# Altium PCB PCB2.PcbDoc
Units mm, origin at the board's own origin, x right, y up, seen from the top; angles counter-clockwise.
Board outline 28 x 43 mm, 2 copper layers (Top Layer, Bottom Layer); 31 components, 24 nets, 110 pads, 0 vias.
Unrouted connection lines stored in the file: 2.
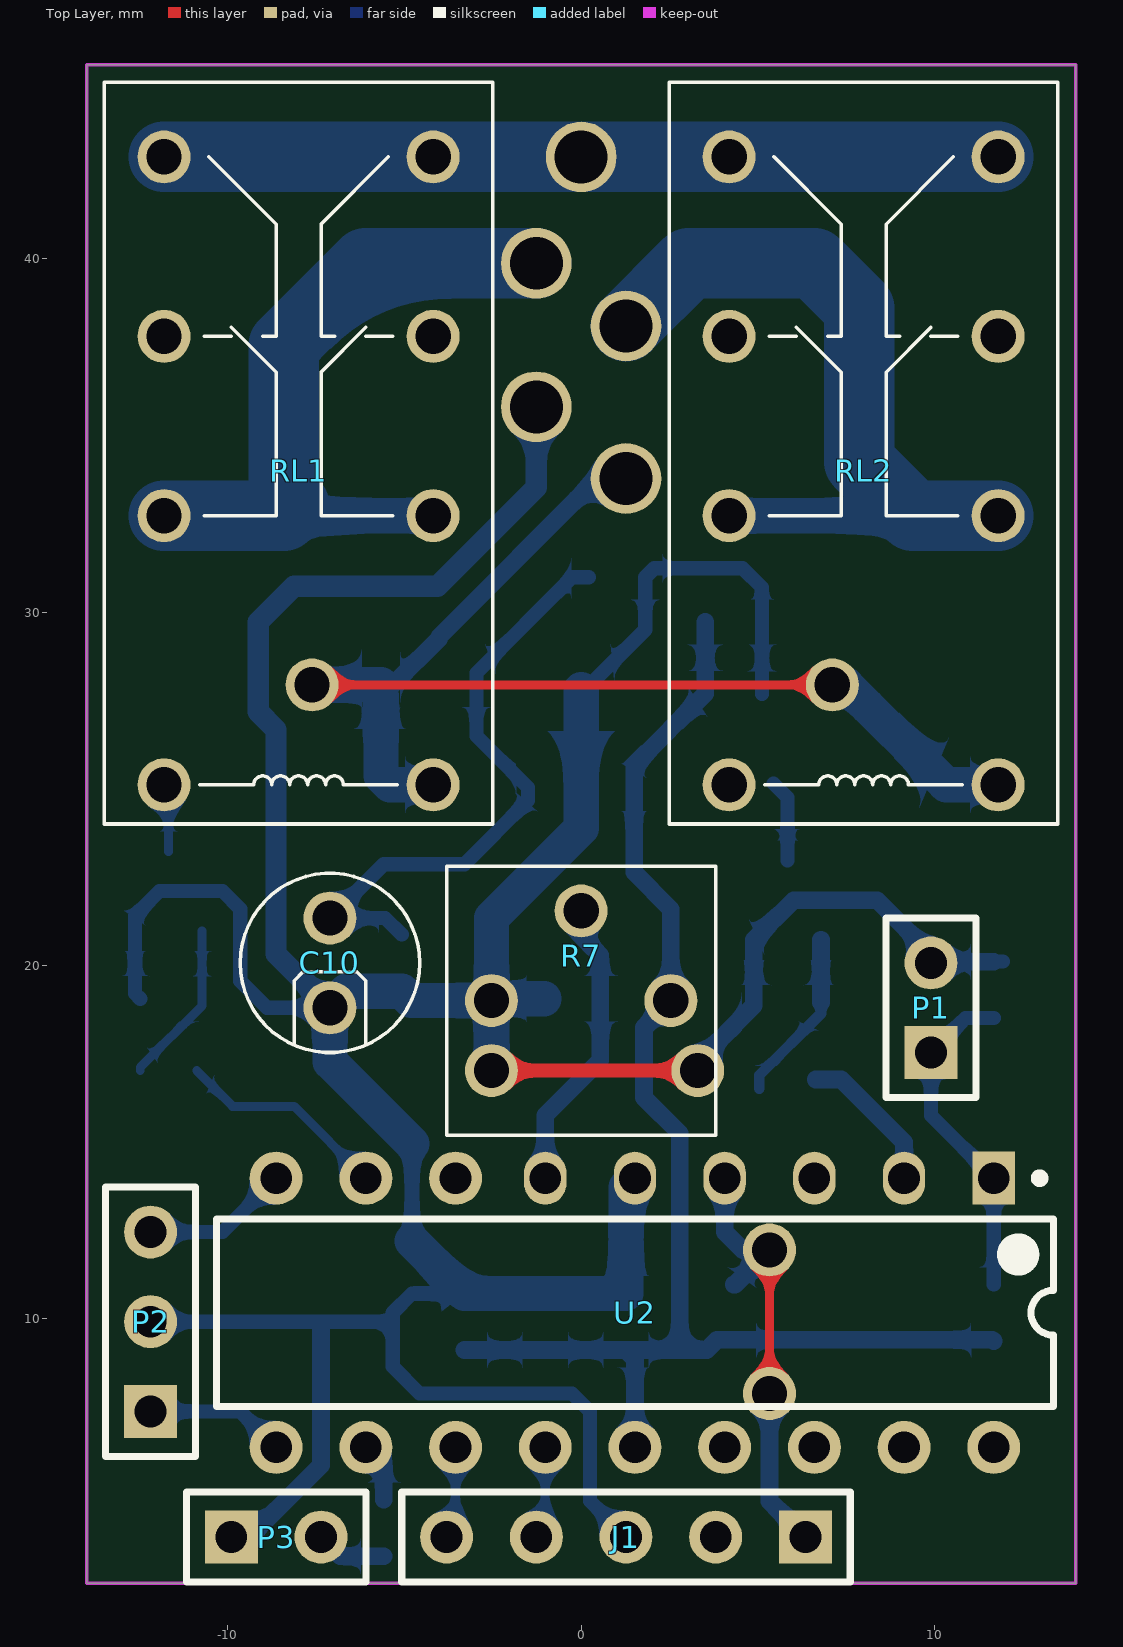
[diagram p0: Top Layer view]
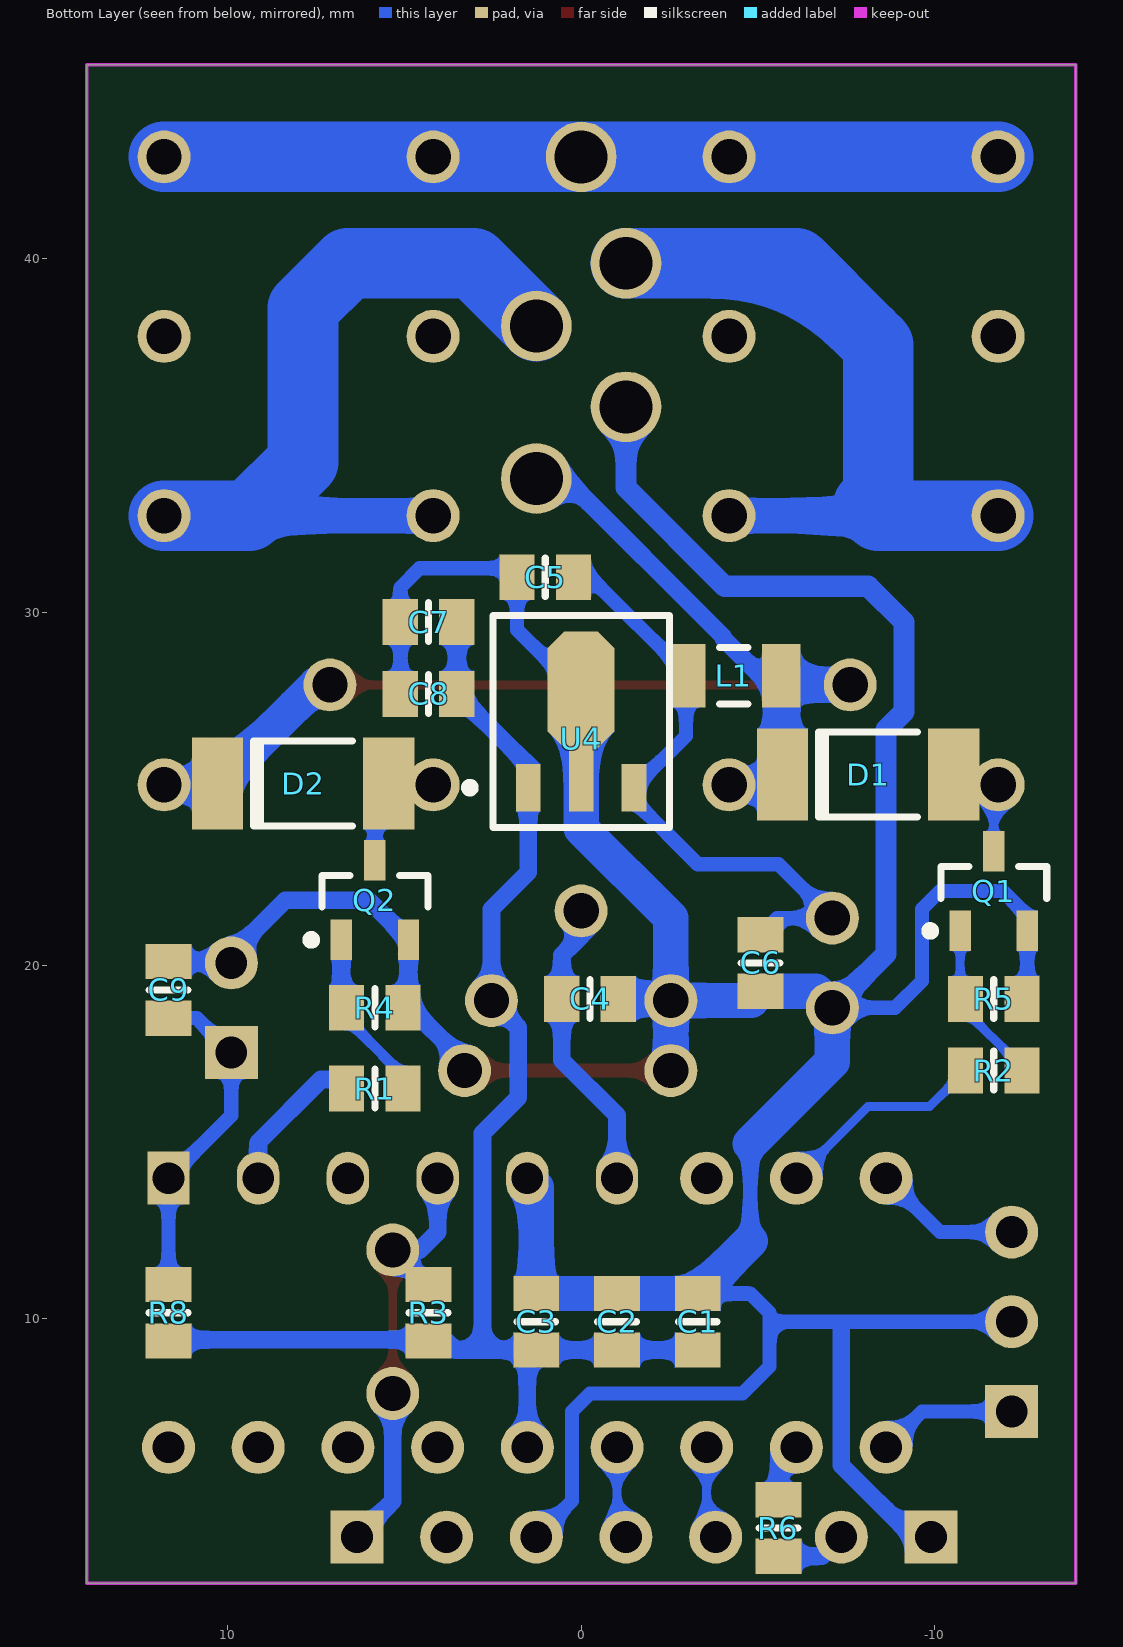
[diagram p1: Bottom Layer view, seen from below]

## Layer stack, top to bottom
Top Solder: solder mask 0.0102, Solder Resist, Dk 3.5
Top Layer: signal copper 0.0356
Dielectric1: dielectric 0.32, FR-4, Dk 4.8
Bottom Layer: signal copper 0.0356
Bottom Solder: solder mask 0.0102, Solder Resist, Dk 3.5

## Board outline
-14,2.5 -14,45.5 14,45.5 14,2.5

## Design rules (kind name [scope] priority, off if disabled: settings)
Clearance [All] p1: gap=0.254
HoleToHoleClearance [All] p1 off: gap=0.254 allowstackedmicrovias=TRUE
MinimumSolderMaskSliver [All] p1 off: minsoldermaskwidth=0.254
PolygonConnect [All] p1: connectstyle=Direct reliefconductorwidth=0.254 reliefentries=4 polygonreliefangle="90 Angle" airgapwidth=0.254
RoutingVias [All] p1: holewidth=0.711 width=1.27 viastyle="Through Hole" minholewidth=0.711 minwidth=1.27 maxholewidth=3 maxwidth=2
SilkToSolderMaskClearance SilkscreenOverComponentPads [IsPad] p1 off: minsilkscreentomaskgap=0.254 clearancetoexposedcopper=TRUE
SolderMaskExpansion [All] p1: expansion=0.102
Width [All] p1: maxlimit=2 minlimit=0.254 preferedwidth=0.3
27 further rules are at their usual default settings.

## Components (designator, comment, footprint, x,y, rotation, side; value= is the part's Value field where it differs from the comment)
C1 "Cap Semi" RESC2012L -3.302,9.906 r270 bottom
C2 "Cap Semi" RESC2012L -1.016,9.906 r270 bottom
C3 "Cap Semi" RESC2012L 1.27,9.906 r270 bottom
C4 "Cap Semi" RESC2012L -0.254,19.05 r0 bottom
C5 "Cap Semi" RESC2012L 1.016,30.988 r180 bottom
C6 "Cap Semi" RESC2012L -5.08,20.066 r90 bottom
C7 "Cap Semi" RESC2012L 4.318,29.718 r180 bottom
C8 "Cap Semi" RESC2012L 4.318,27.686 r180 bottom
C9 "Cap Semi" RESC2012L 11.684,19.304 r270 bottom
C10 "Cap Pol1" CAP5 -7.112,20.066 r90 top
D1 "1n4148" MELF-D5022-2009 -8.128,25.4 r0 bottom
D2 "1n4148" MELF-D5022-2009 7.874,25.146 r0 bottom
J1 "programer" HDR1x5 6.35,3.81 r180 top
L1 "" INDC3216 -4.318,28.194 r0 bottom
P1 "Header 2" HDR1X2 9.906,17.526 r90 top
P2 "Header 3" HDR1X3 -12.192,7.366 r90 top
P3 "LED" HDR1X2 -9.906,3.81 r0 top
Q1 "C1815" SOT-23B -11.684,22.098 r270 bottom
Q2 "NPN" SOT-23B 5.842,21.844 r270 bottom
R1 "Res3" RESC2012L 5.842,16.51 r180 bottom
R2 "Res3" RESC2012L -11.684,17.018 r180 bottom
R3 "Res3" RESC2012L 4.318,10.16 r90 bottom
R4 "Res3" RESC2012L 5.842,18.796 r180 bottom
R5 "Res3" RESC2012L -11.684,19.05 r180 bottom
R6 "Res3" RESC2012L -5.588,4.064 r270 bottom
R7 "Res Tap" VR_V_MH 0,19 r0 top locked
R8 "Res3" RESC2012L 11.684,10.16 r90 bottom
RL1 "Relay-DPDT" RELAY_8PIN_MH -8,34 r0 top locked
RL2 "Relay-DPDT" RELAY_8PIN_MH 8,34 r0 top locked
U2 "PIC18F1220-E/P" PDIP300-P18 1.524,10.16 r270 top locked
U4 "µA78L05ACPKR" PK03 0,26.416 r0 bottom

## Footprints (in the part's own frame and the unit in brackets; to place one, negate y for a bottom-side part, rotate by r counter-clockwise, add the part's x,y. Pads: shape width x height; smd on the part's side, far side on the other; paste and mask are expansions set on the pad)
CAP5 [mm]
  round 1.5 hole 1 mask+0.01: 1(1.27,0) 2(-1.27,0)
  silkscreen extent -2.54,-2.54 2.54,2.54
HDR1X2 [mm] "Connector; Header; 2 Position"
  rect 1.5x1.5 hole 0.9: 1(0,0)
  round 1.5 hole 0.9: 2(2.54,0)
  silkscreen extent -1.27,-1.27 3.81,1.27
HDR1X3 [mm] "Connector; Header; 3 Position"
  rect 1.5x1.5 hole 0.9: 1(0,0)
  round 1.5 hole 0.9: 2(2.54,0) 3(5.08,0)
  silkscreen extent -1.27,-1.27 6.35,1.27
HDR1x5 [mm] "Connector; Header; 5 Position"
  rect 1.5x1.5 hole 0.9: 1(0,0)
  round 1.5 hole 0.9: 2(2.54,0) 3(5.08,0) 4(7.62,0) 5(10.16,0)
  silkscreen extent -1.27,-1.27 11.43,1.27
INDC3216 [mm] "Chip Inductor, Body 3.2x1.6mm, IPC High Density"
  rect 1.1x1.8 smd: 1(-1.35,0) 2(1.35,0)
  silkscreen extent -0.4,-0.8 0.4,0.8, body extent -1.7,-0.9 1.7,0.9, height 0.55
MELF-D5022-2009 [mm] "Metal Electrode Face (MELF) Diode; Body 5 x 2.5 mm (LxDia)"
  rect 1.45x2.6 smd: 1(-2.425,0) 2(2.425,0)
  silkscreen extent -1.4,-1.2 1.4,1.2
PDIP300-P18 [mm] "DIP, 18-Leads, Row Spacing 7.62mm, Pitch 2.54mm, Body 22.9x6.6mm"
  rect 1.5x1.2 hole 0.9: 1(-3.81,10.16)
  oval 1.5x1.2 hole 0.9: 2(-3.81,7.62) 3(-3.81,5.08) 4(-3.81,2.54) 5(-3.81,0) 6(-3.81,-2.54)
  round 1.5 hole 0.9: 7(-3.81,-5.08) 8(-3.81,-7.62) 9(-3.81,-10.16) 10(3.81,-10.16) 11(3.81,-7.62) 12(3.81,-5.08) 13(3.81,-2.54) 14(3.81,0) 15(3.81,2.54) 16(3.81,5.08) 17(3.81,7.62) 18(3.81,10.16)
  silkscreen extent -3.93,-11.85 2.65,11.85, body extent -3.6,-11.8 3.6,11.8, height 5.34
PK03 [mm] "SOT-89; Body 4.6 x 4.25 mm, inc. leads (LxW max)"
  rect 0.7x1.35 smd: 1(1.5,1.388) 3(-1.5,1.388)
  rect 0.7x1.8 smd: 2(0,1.162)
  oct 1.9x3.3 smd: 4(0,-1.388)
  silkscreen extent -2.5,-3.49 3.28,2.51
RELAY_8PIN_MH [mm]
  round 1.5 hole 1 mask+0.01: 1(-3.81,-1.27) 2(-3.81,3.81) 3(-3.81,8.89) 4(3.81,-1.27) 5(3.81,3.81) 6(3.81,8.89) 7(-3.81,-8.89) 8(3.81,-8.89)
  silkscreen extent -5.5,-10 5.5,11
RESC2012L [mm] "Chip Resistor, Body 2.0x1.3mm, IPC High Density"
  rect 1x1.3 smd: 1(-0.8,0) 2(0.8,0)
  silkscreen extent 0,-0.55 0,0.55, body extent -1.07,-0.7 1.07,0.7, height 0.65
SOT-23B [mm] "SOT23, 3-Leads, Body 2.9x1.3mm, Pitch 0.95mm, Lead Span 2.4mm, IPC Medium Density"
  rect 1.15x0.6 smd: 1(-1.125,0) 2(1.125,-0.95) 3(1.125,0.95)
  silkscreen extent -0.7,-1.93 1.25,1.5, body extent -0.7,-1.5 0.7,1.5, height 1.14
VR_V_MH [mm]
  round 1.5 hole 1 mask+0.01: 1(-2.54,0) 2(2.54,0) 3(0,2.54)
  silkscreen extent -3.81,-3.81 3.81,3.81

## Part data
C1 C2 C3 C4 C5 C6 C7 C8 C9: "Capacitor (Semiconductor SIM Model)"
C10: "Polarized Capacitor (Radial)"
D1 D2: library part 1N4148_SMD, "Schottky Diode"
J1: library part CON5, "Connector"
L1: library part Inductor, "Inductor"
P1: "Header, 2-Pin"
P2: "Header, 3-Pin"
P3: library part "Header 2", "Header, 2-Pin"
Q1: library part NPN, "NPN Bipolar Transistor"
Q2: "NPN Bipolar Transistor"
R1 R2 R3 R4 R5 R6 R8: "Resistor"
R7: "Tapped Resistor"
RL1 RL2: "Dual-Pole Dual-Throw Relay"
U2: "High Performance, Enhanced Flash Microcontroller with 10-Bit A/D and nanoWatt Technology, 4K Flash, 18-Pin PDIP, Extended Temperature"
U4: "Positive-Voltage Regulator"

## Free pads (board coordinates)
  round 1.5 hole 1 mask+0.01: 0(5.334,7.874) 1(5.334,11.938) 2(3.302,17.018) 3(-2.54,17.018) 4(7.112,27.94) 5(-7.62,27.94)
  round 2 hole 1.5 mask+0.01: 6(-1.27,35.814) 6(-1.27,39.878) 6(0,42.89) 6(1.27,33.782) 6(1.27,38.1)

## Nets (pads, with @x,y where several pads share a name; then routed paths per layer and width w, separated by ;. In a path a pad name is that pad's centre, name@x,y a point inside that pad or via, vN(x,y) a via of type N, cw(c..) or ccw(c..) an arc to the next point about the centre after c; other vN are vias at no path point)
+5V: C1.2 C2.2 C3.2 C7.2 C8.2 R3.1 R7.2 R8.1 U2.14 U4.1 | length 40.6
  Bottom Layer w0.5: C1.2 C2.2 C3.2 ; U2.14 1.524,8.852 C3.2 ; C7.2 C8.2 1.5,25.668 U4.1 1.5,22.63 2.54,21.59 R7.2 1.778,18.238 1.778,16.256 2.794,15.24 2.794,9.106 ; R8.1 11.646,9.398 3.848,9.398 3.556,9.106 2.794,9.106 ; C3.2 2.794,9.106
+12V: D1.2 D2.2 L1.1 pad.4 pad.5 pad.6@1.27,33.782 RL1.8 RL2.8 | length 38.6
  Top Layer w0.254: pad.5 pad.4
  Bottom Layer w0.5: D1.2 -5.703,27.94 -5.334,27.94 -4.022,29.252 -4.022,29.303 0.457,33.782 pad.6@1.27,33.782
  Bottom Layer w1: pad.5 L1.1@-5.703,27.94 ; L1.1@-5.668,27.94 -5.668,25.365 -5.413,25.11 RL1.8 ; pad.4 7.505,27.94 D2.2 10.335,25.11 RL2.8
COM: pad.6@0,42.89 RL1.3 RL1.6 RL2.3 RL2.6 | length 23.6
  Bottom Layer w2: RL1.3 RL1.6 0,42.89 RL2.3 RL2.6
GND: C1.1 C2.1 C3.1 C4.1 C5.1 C6.1 C7.1 C8.1 C9.1 C10.2 J1.3 P1.2 P2.2 P3.1 pad.2 pad.3 pad.6@-1.27,35.814 Q1.3 Q2.3 R4.2 R5.2 R7.1 U2.5 U4.2 U4.4 | length 127.9
  Top Layer w0.4: pad.3 pad.2
  Bottom Layer w0.4: R5.2 -12.634,19.2 Q1.3 -12.634,21.402 -11.938,22.098 -10.16,22.098 -9.652,21.59 -9.652,19.558 -8.89,18.796 C10.2 ; P2.2 -5.334,9.906 ; -4.788,12.192 -4.788,14.948 ; C1.1 -4.788,10.706 -5.334,10.16 -5.334,9.906 ; R7.1 R7.1@-2.49,19.05 ; U4.4 0.118,27.804 1.816,29.502 C5.1 2.07,31.242 4.572,31.242 5.118,30.696 C7.1 C8.1 ; J1.3 0.254,4.826 0.254,7.366 -0.254,7.874 -4.572,7.874 -5.334,8.636 -5.334,9.906 ; P1.2 9.944,20.104 P1.2@10.63,20.104 ; C9.1 C9.1@11.938,20.104
  Bottom Layer w0.5: P3.1@-9.652,3.81 -9.403,3.81 -7.366,5.847 -7.366,9.652 ; pad.2 3.302,17.272 4.892,18.862 Q2.3 6.017,21.844 8.382,21.844 10.122,20.104 C9.1
  Bottom Layer w0.6: P3.1 P3.1@-9.652,3.81 ; C10.2 -8.636,20.32 -8.636,26.67 -9.144,27.178 -9.144,29.718 -8.128,30.734 -4.064,30.734 -1.27,33.528 pad.6@-1.27,35.814
  Bottom Layer w1: -4.788,12.192 C1.1 C2.1 C3.1 1.27,13.716 U2.5 ; -4.788,14.948 -7.112,17.272 C10.2 -6.642,19.266 C6.1 -4.814,19 R7.1 ; pad.3 R7.1 ; R7.1@-2.49,19.05 C4.1 ; U4.4 0,23.876 -2.54,21.336 R7.1
HEAD_LAMP: pad.6@1.27,38.1 RL2.1 RL2.4 | length 22
  Bottom Layer w1: RL2.1 9.398,32.73
  Bottom Layer w2: pad.6@1.27,38.1 3.048,39.878 6.604,39.878 7.874,38.608 7.874,34.254 9.398,32.73 RL2.4
ILLUMINATION: pad.6@-1.27,39.878 RL1.1 RL1.4 | length 29.1
  Bottom Layer w0.5: -8.128,33.02 -8.128,37.846 -8.128,38.608 -6.858,39.878 -6.096,39.878
  Bottom Layer w1: -8.418,32.73 RL1.4
  Bottom Layer w2: RL1.1 -8.418,32.73 ; -8.128,33.02 -8.418,32.73 ; pad.6@-1.27,39.878 -6.096,39.878 -8.128,37.846 -8.418,37.556 -8.418,32.73
NetC4_2: C4.2 R7.3 U2.6 | length 8.4
  Bottom Layer w0.5: U2.6 -1.016,15.748 0.546,17.31 C4.2 0.546,20.282 0,20.828 R7.3
NetC5_2: C5.2 C6.2 C10.1 L1.2 U4.3 | length 17.7
  Bottom Layer w0.4: C6.2 -5.55,21.336 C10.1 -5.588,22.86 -3.302,22.86 -1.5,24.662 U4.3 -2.968,26.497 L1.2 -2.968,28.274 -0.254,30.988 C5.2
NetC9_2: C9.2 P1.1 R8.2 U2.1 | length 9.5
  Bottom Layer w0.4: R8.2 U2.1 9.906,15.748 P1.1 10.884,18.504 C9.2
NetD1_1: D1.1 Q1.1 RL1.7 | length 1.9
  Bottom Layer w0.254: RL1.7 -11.684,24.984 Q1.1
NetD2_1: D2.1 Q2.1 RL2.7 | length 2.3
  Bottom Layer w0.4: D2.1 5.842,24.753 Q2.1
NetP3_2: P3.2 R6.2 | length 2
  Bottom Layer w0.5: P3.2 -6.82,3.264 R6.2
NetQ1_2: Q1.2 R2.2 R5.1 | length 4.7
  Bottom Layer w0.254: R2.2 -12.484,17.107 -10.734,18.857 Q1.2
NetQ2_2: Q2.2 R1.2 R4.1 | length 4.9
  Bottom Layer w0.3: R1.2 5.042,16.885 6.792,18.635 R4.1@6.792,18.946
  Bottom Layer w0.5: R4.1@6.792,18.946 Q2.2
NetR1_1: R1.1 U2.2 | length 4.3
  Bottom Layer w0.5: R1.1@6.642,16.764 7.366,16.764 9.144,14.986 U2.2
NetRL1_2: RL1.2 RL1.5
NetRL2_2: RL2.2 RL2.5
PGC: J1.5 U2.12 | length 2.6
  Bottom Layer w0.254: J1.5 -3.556,4.064 U2.12
PGD: J1.4 U2.13 | length 2.6
  Bottom Layer w0.254: J1.4 -1.016,4.064 U2.13
RLC: R2.1 U2.8 | length 6.1
  Bottom Layer w0.254: R2.1 -9.868,16.002 -8.128,16.002 U2.8
RST: J1.1 pad.0 pad.1 R3.2 U2.4 | length 13
  Top Layer w0.254: pad.0 pad.1
  Bottom Layer w0.5: U2.4 4.064,12.446 4.572,11.938 pad.1 4.356,10.96 R3.2 ; pad.0 5.334,4.826 J1.1
RX: P2.1 U2.10 | length 4
  Bottom Layer w0.4: P2.1 -9.652,7.366 U2.10
STATUS: R6.1 U2.11 | length 1.7
  Bottom Layer w0.5: U2.11 -5.588,5.842 R6.1
TX: P2.3 U2.9 | length 4.2
  Bottom Layer w0.4: P2.3 -10.16,12.446 U2.9
pads on no net: J1.2 U2.3 U2.7 U2.15 U2.16 U2.17 U2.18

## Keep-outs
Keep-Out Layer:
  the board outline again, w0.1

## Silkscreen, mask and mechanical layers (free items; w line width, h text height)
Mechanical 1:
  circle w0.1: c0,19 r1.75
  lines w0.1: -17,0 17,0 17,48 -17,48 -17,0